# EAGLE board Secuencia_LEDs_MotherBoard_MIDI_&_BT (EAGLE 5.11)
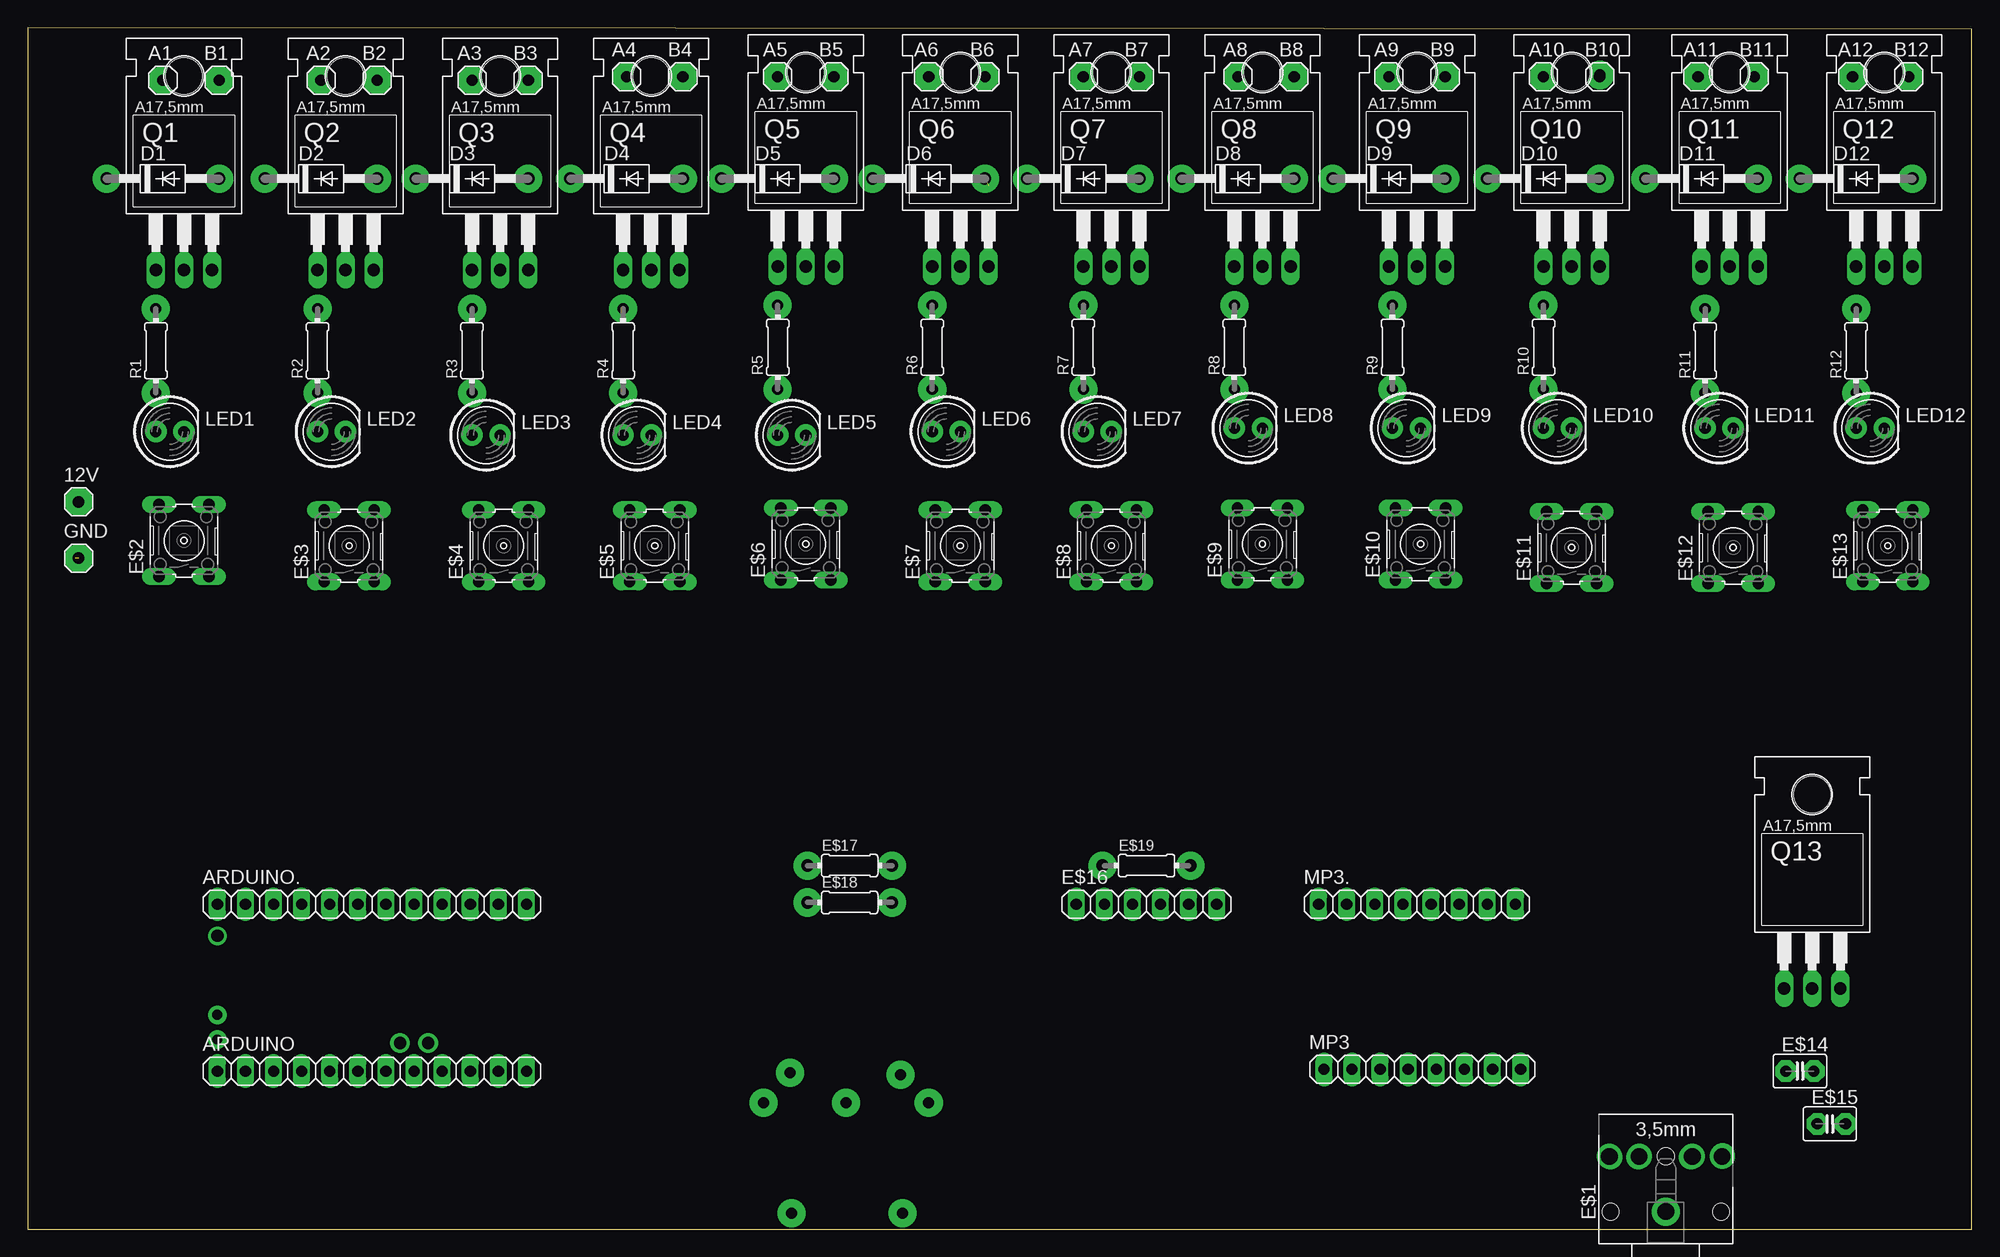
[diagram p0: board, top side]
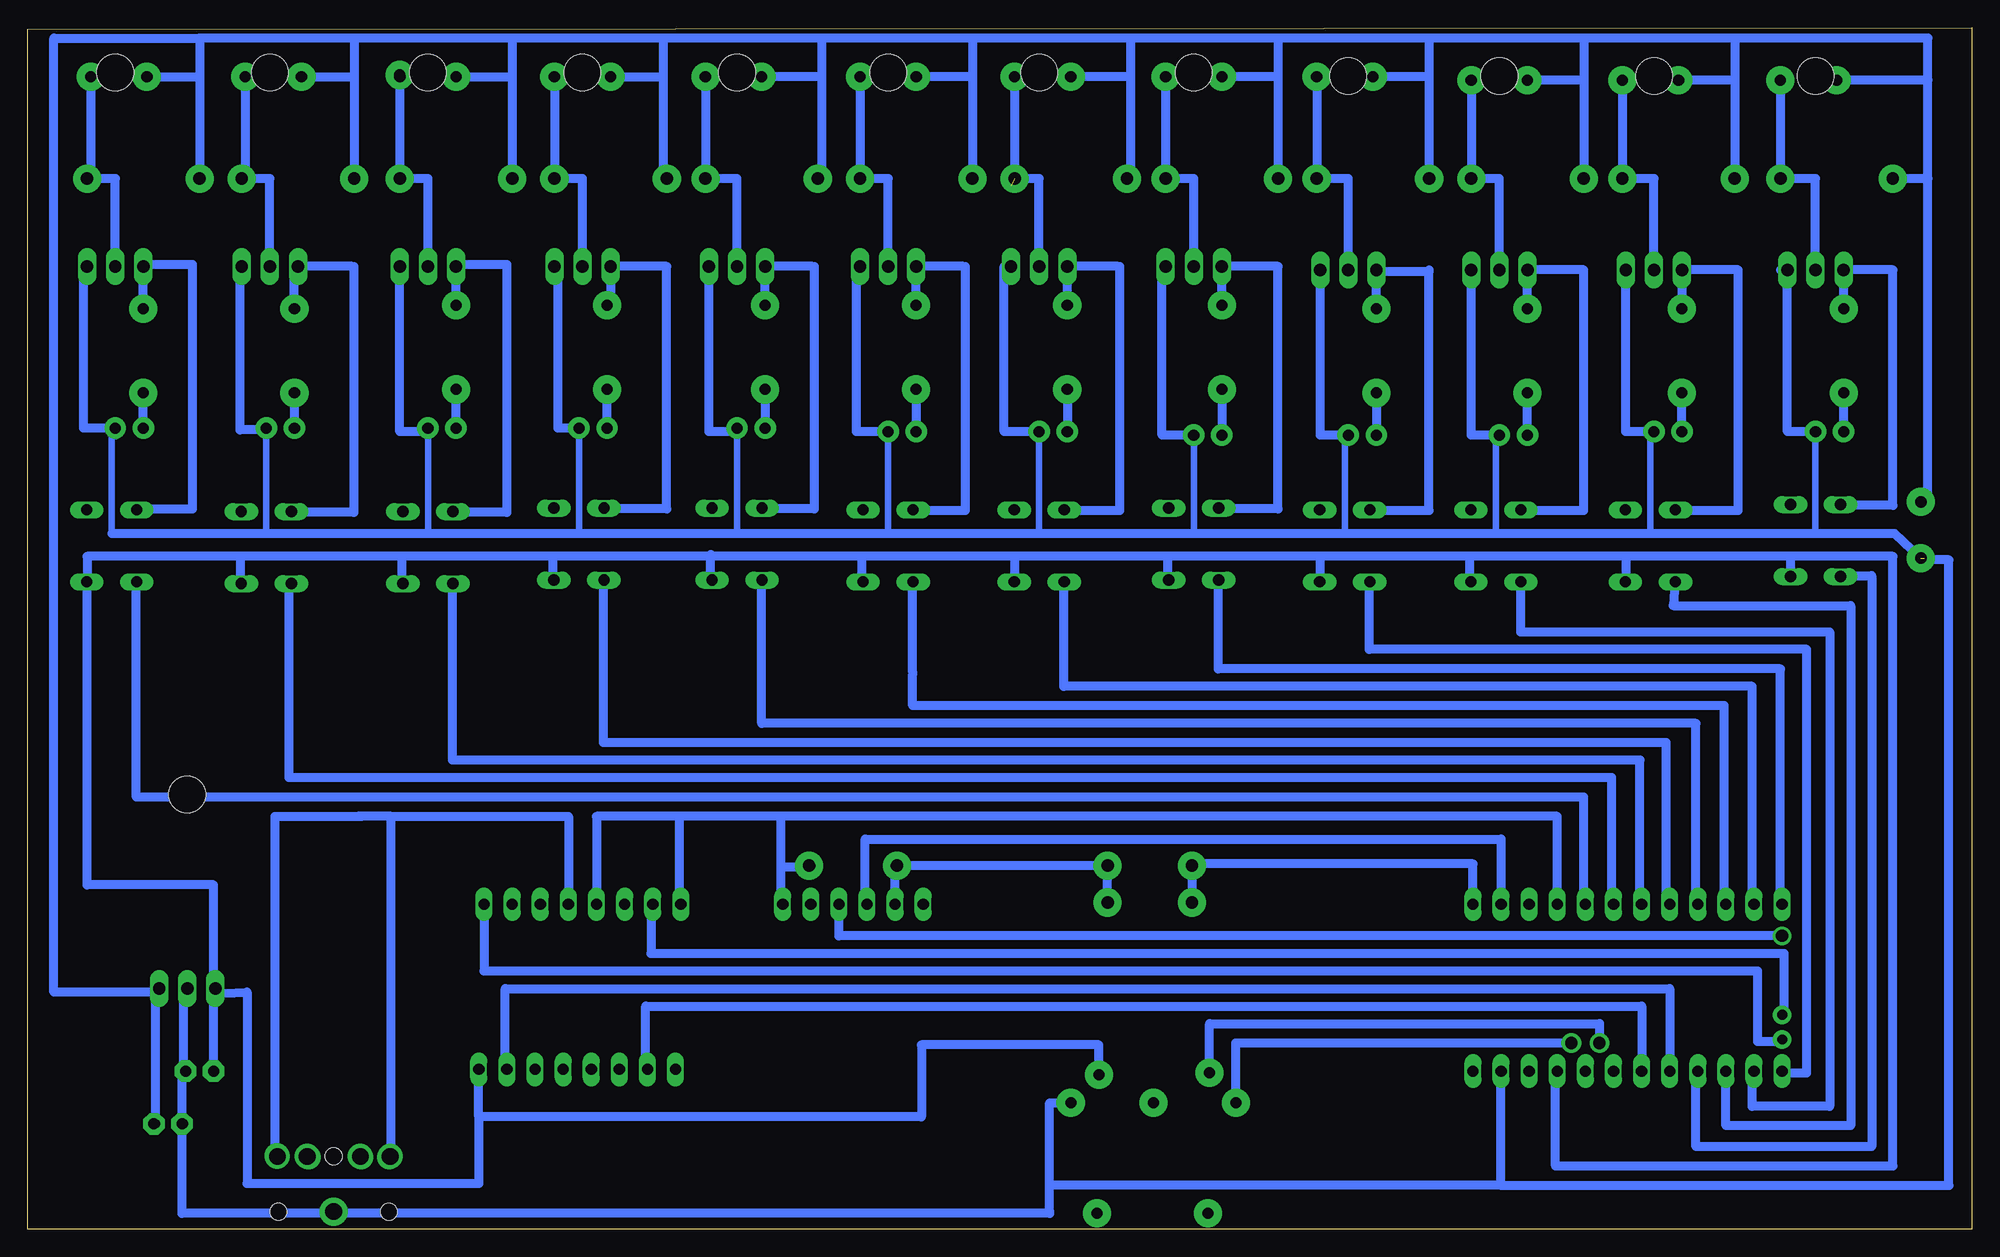
[diagram p1: board, bottom side, seen from below]

Size 175.72 x 108.57 mm. Coordinates in mm from the lower left corner, seen from the top.
Outline: 0,0 175.72,0 175.72,108.41 0,108.57 0,0
Copper layers (1*16): Top 0.035mm / dielectric 1.5mm / Bottom 0.035mm
Design rules "default": minimum track width 10mil, minimum drill 24mil, track to track 8mil, track to pad 8mil, pad to pad 8mil, via to via 8mil, smd to smd 8mil, copper to edge 40mil, drill to drill 8mil, minimum pad ring 10mil, minimum via ring 8mil, stop-mask expansion 4mil, vias tented up to drill 0mil, thermal gap 10mil

## Footprints (pad centres in the part's own frame; a part is rotated, then mirrored left to right if it is on the bottom)
1X01 = drill 1.016 octagon: 1 0,0
1X12 = drill 1.016 long: 1 -13.97,0; 2 -11.43,0; 3 -8.89,0; 4 -6.35,0; 5 -3.81,0; 6 -1.27,0; 7 1.27,0; 8 3.81,0; 9 6.35,0; 10 8.89,0; 11 11.43,0; 12 13.97,0
DO41-10 = drill 1.118 round: A 5.08,0; C -5.08,0
STX3100 = drill 1.5 pad 2.54 round: 1 2.7,-0.1 | drill 1.5 round: 2 7.7,5; 3 7.7,2.3; 4 7.7,-2.5; 5 7.7,-5.2 | hole 1.5: 2.7,4.9; 2.7,-5.1; 7.7,-0.1
B3F-10XX = drill 1.016 long: 1 -3.251,2.261; 2 3.251,2.261; 3 -3.251,-2.261; 4 3.251,-2.261
C2.5-3 = drill 0.813 pad 1.6 octagon: 1 -1.27,0; 2 1.27,0
1X06 = drill 1.016 long: 1 -6.35,0; 2 -3.81,0; 3 -1.27,0; 4 1.27,0; 5 3.81,0; 6 6.35,0
0204/7 = drill 0.813 octagon: 1 -3.81,0; 2 3.81,0
LED5MM = drill 0.813 octagon: A -1.27,0; K 1.27,0
1X08 = drill 1.016 long: 1 -8.89,0; 2 -6.35,0; 3 -3.81,0; 4 -1.27,0; 5 1.27,0; 6 3.81,0; 7 6.35,0; 8 8.89,0
TO220BH = drill 1.118 long: D 0,-6.35; G -2.54,-6.35; S 2.54,-6.35 | hole 3.302: 0,11.176

## Placement (x,y rotation side)
12V  [1X01]  4.6,65.72 0 top
A1  [1X01]  12.22,103.82 0 top
A2  [1X01]  26.51,103.82 0 top
A3  [1X01]  40.16,103.82 0 top
A4  [1X01]  54.13,104.14 0 top
A5  [1X01]  67.79,104.14 0 top
A6  [1X01]  81.44,104.14 0 top
A7  [1X01]  95.41,104.14 0 top
A8  [1X01]  109.38,104.14 0 top
A9  [1X01]  123.03,104.14 0 top
A10  [1X01]  137,104.14 0 top
A11  [1X01]  150.97,104.14 0 top
A12  [1X01]  164.94,104.14 0 top
ARDUINO  [1X12]  31.12,14.29 0 top
ARDUINO.  [1X12]  31.12,29.37 0 top
B1  [1X01]  17.3,103.82 0 top
B2  [1X01]  31.59,103.82 0 top
B3  [1X01]  45.24,103.82 0 top
B4  [1X01]  59.21,104.14 0 top
B5  [1X01]  72.87,104.14 0 top
B6  [1X01]  86.52,104.14 0 top
B7  [1X01]  100.49,104.14 0 top
B8  [1X01]  114.46,104.14 0 top
B9  [1X01]  128.11,104.14 0 top
B10  [1X01]  142.08,104.14 0 top
B11  [1X01]  156.05,104.14 0 top
B12  [1X01]  170.02,104.14 0 top
D1  1N4004  [DO41-10]  12.22,94.93 0 top
D2  1N4004  [DO41-10]  26.51,94.93 0 top
D3  1N4004  [DO41-10]  40.16,94.93 0 top
D4  1N4004  [DO41-10]  54.13,94.93 0 top
D5  1N4004  [DO41-10]  67.79,94.93 0 top
D6  1N4004  [DO41-10]  81.44,94.93 0 top
D7  1N4004  [DO41-10]  95.41,94.93 0 top
D8  1N4004  [DO41-10]  109.38,94.93 0 top
D9  1N4004  [DO41-10]  123.03,94.93 0 top
D10  1N4004  [DO41-10]  137,94.93 0 top
D11  1N4004  [DO41-10]  151.29,94.93 0 top
D12  1N4004  [DO41-10]  165.26,94.93 0 top
E$1  [STX3100]  147.96,-1.11 90 top
E$2  [B3F-10XX]  14.13,62.23 90 top
E$3  [B3F-10XX]  29.05,61.75 90 top
E$4  [B3F-10XX]  43.02,61.75 90 top
E$5  [B3F-10XX]  56.67,61.75 90 top
E$6  [B3F-10XX]  70.33,61.91 90 top
E$7  [B3F-10XX]  84.3,61.75 90 top
E$8  [B3F-10XX]  97.95,61.75 90 top
E$9  [B3F-10XX]  111.6,61.91 90 top
E$10  [B3F-10XX]  125.89,61.91 90 top
E$11  [B3F-10XX]  139.54,61.59 90 top
E$12  [B3F-10XX]  154.15,61.59 90 top
E$13  [B3F-10XX]  168.12,61.75 90 top
E$14  [C2.5-3]  160.18,14.29 0 top
E$15  [C2.5-3]  162.88,9.52 0 top
E$16  [1X06]  101.12,29.37 0 top
E$17  1 K  [0204/7]  74.3,32.86 0 top
E$18  1 K  [0204/7]  74.3,29.53 0 top
E$19  1 K  [0204/7]  101.12,32.86 0 top
GND  [1X01]  4.6,60.64 0 top
LED1  [LED5MM]  12.86,72.07 0 top
LED2  [LED5MM]  27.46,72.07 0 top
LED3  [LED5MM]  41.43,71.75 0 top
LED4  [LED5MM]  55.09,71.75 0 top
LED5  [LED5MM]  69.06,71.75 0 top
LED6  [LED5MM]  83.03,72.07 0 top
LED7  [LED5MM]  96.68,72.07 0 top
LED8  [LED5MM]  110.33,72.39 0 top
LED9  [LED5MM]  124.62,72.39 0 top
LED10  [LED5MM]  138.27,72.39 0 top
LED11  [LED5MM]  152.88,72.39 0 top
LED12  [LED5MM]  166.53,72.39 0 top
MP3  [1X08]  126.05,14.45 0 top
MP3.  [1X08]  125.57,29.37 0 top
Q1  IRLZ44Z  [TO220BH]  14.13,93.03 0 top
Q2  IRLZ44Z  [TO220BH]  28.73,93.03 0 top
Q3  IRLZ44Z  [TO220BH]  42.7,93.03 0 top
Q4  IRLZ44Z  [TO220BH]  56.36,93.03 0 top
Q5  IRLZ44Z  [TO220BH]  70.33,93.34 0 top
Q6  IRLZ44Z  [TO220BH]  84.3,93.34 0 top
Q7  IRLZ44Z  [TO220BH]  97.95,93.34 0 top
Q8  IRLZ44Z  [TO220BH]  111.6,93.34 0 top
Q9  IRLZ44Z  [TO220BH]  125.57,93.34 0 top
Q10  IRLZ44Z  [TO220BH]  139.54,93.34 0 top
Q11  IRLZ44Z  [TO220BH]  153.83,93.34 0 top
Q12  IRLZ44Z  [TO220BH]  167.8,93.34 0 top
Q13  IRLZ44Z  [TO220BH]  161.29,28.1 0 top
R1  2.2 k  [0204/7]  11.59,79.38 90 top
R2  2.2 k  [0204/7]  26.19,79.38 90 top
R3  2.2 k  [0204/7]  40.16,79.38 90 top
R4  2.2 k  [0204/7]  53.82,79.38 90 top
R5  2.2 k  [0204/7]  67.79,79.69 90 top
R6  2.2 k  [0204/7]  81.76,79.69 90 top
R7  2.2 k  [0204/7]  95.41,79.69 90 top
R8  2.2 k  [0204/7]  109.06,79.69 90 top
R9  2.2 k  [0204/7]  123.35,79.69 90 top
R10  2.2 k  [0204/7]  137,79.69 90 top
R11  2.2 k  [0204/7]  151.61,79.38 90 top
R12  2.2 k  [0204/7]  165.26,79.38 90 top

## Library data of the parts
12V A1-A12 ARDUINO ARDUINO. B1-B12 E$16 GND MP3 MP3. = pinhead
D1-D12 = diode
E$1 = adafruit
E$2-E$13 = switch-omron-vertical-long
E$14 E$15 = capacitor-wima
E$17-E$19 R1-R12 = resistor
LED1-LED12 = led
Q1-Q13 = transistor-power

## Nets
N$1: Q1.G R1.2
N$2: LED1.A R1.1
N$3: B1.1 D1.A Q1.D
N$7: Q2.G R2.2
N$8: LED2.A R2.1
N$9: D2.A Q2.D
N$11: A1.1 A2.1 A3.1 A4.1 A5.1 A6.1 A7.1 A8.1 A9.1 A10.1 A11.1 A12.1 D1.C D2.C D3.C D4.C D5.C D6.C D7.C D8.C D9.C D10.C D11.C D12.C
N$13: Q3.G R3.2
N$14: LED3.A R3.1
N$15: B3.1 D3.A Q3.D
N$19: Q4.G R4.2
N$20: LED4.A R4.1
N$21: B4.1 D4.A Q4.D
N$25: Q5.G R5.2
N$26: LED5.A R5.1
N$27: B5.1 D5.A Q5.D
N$32: LED6.A R6.1
N$33: D6.A Q6.D
N$38: LED7.A R7.1
N$39: B7.1 D7.A Q7.D
N$44: LED8.A R8.1
N$45: D8.A Q8.D
N$49: Q9.G R9.2
N$50: LED9.A R9.1
N$51: B9.1 D9.A Q9.D
N$55: Q10.G R10.2
N$56: LED10.A R10.1
N$57: B10.1 D10.A Q10.D
N$62: LED11.A R11.1
N$63: B11.1 D11.A Q11.D
N$68: LED12.A R12.1
N$69: B12.1 D12.A Q12.D
N$88: B8.1
N$142: B2.1
S$2: GND.1 LED1.K LED3.K LED4.K LED5.K LED6.K LED7.K LED8.K LED9.K LED10.K LED11.K LED12.K Q1.S Q3.S Q4.S Q5.S Q6.S Q7.S Q8.S Q9.S Q10.S Q11.S Q12.S
S$3: B6.1
S$32: Q12.G R12.2
S$48: Q11.G R11.2
S$51: Q6.G R6.2
S$52: Q7.G R7.2
S$53: Q8.G R8.2
S$55: LED2.K Q2.S
S$60: ARDUINO.6
S$97: E$16.2 E$19.1

## Tracks (layer width: path | path; a pad name or v marks a point on that pad's centre or on a via)
A7  (via drill 0.9 pad 1.68)
  other vias: 17.15,19.37
MIDI  (via drill 1 pad 2.54)
  other vias: 73.98,11.43
N$1
  Bottom 0.813: 11.91,65.41 7.14,65.41 7.14,86.68 Q1.G R1.2
N$2
  Bottom 0.813: LED1.A R1.1
N$3
  Bottom 0.813: Q1.D 14.13,94.93 D1.A B1.1
N$5  (via drill 1 pad 2.54)
  other vias: 7.14,94.93
N$6  (via drill 1 pad 2.54)
  other vias: 17.3,94.93
N$7
  Bottom 0.813: Q2.G 26.51,86.68 | Q2.G R2.2 | Q2.G 21.11,86.68 21.11,64.93 26.83,64.93
N$8
  Bottom 0.813: LED2.A R2.1
N$9
  Bottom 0.813: D2.A 28.73,94.93 Q2.D
N$11  (via drill 1 pad 2.54)
  Bottom 0.406: 18.57,107.63 17.94,107.63
  Bottom 0.813: 160.18,104.14 160.18,107.63 146.21,107.63 | 160.18,104.14 D12.C | 146.21,107.63 146.21,104.14 | 146.21,104.14 D11.C | D9.C 118.27,94.93 118.27,104.14 | 131.92,107.63 146.21,107.63 | 131.92,107.63 131.92,104.14 | 131.92,104.14 D10.C | D8.C 103.98,94.93 103.98,104.14 | 103.98,104.14 A8.1 | 118.27,107.63 131.92,107.63 | 118.27,107.63 118.27,104.14 | 90.33,104.14 D7.C | 90.33,104.14 A7.1 | 103.98,107.63 118.27,107.63 | 103.98,107.63 103.98,104.14 | D6.C 76.04,94.93 76.04,104.14 | 76.04,104.14 A6.1 | 90.33,107.63 103.98,107.63 | 90.33,107.63 90.33,104.14 | 62.71,104.14 A5.1 | 62.71,104.14 D5.C | 76.04,107.63 90.33,107.63 | 76.04,107.63 76.04,104.14 | 49.05,104.14 D4.C | 49.05,104.14 A4.1 | 62.71,107.63 76.04,107.63 | 62.71,107.63 62.71,104.14 | 35.08,103.82 D3.C | 35.08,103.82 A3.1 | 49.05,107.63 62.71,107.63 | 49.05,107.63 49.05,104.14 | 21.43,103.82 D2.C | 21.43,103.82 A2.1 | 35.08,107.63 49.05,107.63 | 35.08,107.63 35.08,103.82 | 21.43,107.63 35.08,107.63 | 21.43,107.63 21.43,103.82 | 21.43,107.63 18.57,107.63 3.97,107.63 3.97,103.82 | 3.97,103.82 A1.1 | 3.97,94.93 D1.C | 3.97,94.93 3.97,103.82 | v4.6,65.72 3.97,65.72 3.97,94.93 | A9.1 118.27,104.14 | A10.1 131.92,104.14 | A11.1 146.21,104.14 | A12.1 160.18,104.14
N$13
  Bottom 0.813: 40.8,64.93 35.08,64.93 35.08,86.68 Q3.G R3.2
N$14
  Bottom 0.813: LED3.A R3.1
N$15
  Bottom 0.813: Q3.D 42.7,94.93 D3.A B3.1
N$16  (via drill 1 pad 2.54)
  other vias: 4.6,60.64
N$17  (via drill 1 pad 1.93)
  other vias: 165.26,72.39
N$18  (via drill 1 pad 1.93)
  other vias: 167.8,72.39
N$19
  Bottom 0.813: 54.45,64.93 49.05,64.93 49.05,86.52 | 49.05,86.52 49.05,86.68 | Q4.G 54.13,86.68 54.13,86.04 53.82,86.04 | 53.82,86.04 Q4.G | R4.2 53.82,86.04 | 49.05,86.52 53.82,86.52 Q4.G
N$20
  Bottom 0.813: R4.1 LED4.A
N$21
  Bottom 0.813: Q4.D 56.36,94.93 D4.A B4.1
N$22  (via drill 1 pad 2.54)
  other vias: 165.26,75.56
N$23  (via drill 1 pad 2.54)
  other vias: 165.26,83.19
N$25
  Bottom 0.813: 68.1,65.09 62.71,65.09 62.71,87 Q5.G R5.2
N$26
  Bottom 0.813: R5.1 LED5.A
N$27
  Bottom 0.813: Q5.D 70.33,94.93 D5.A B5.1
N$30  (via drill 1 pad 2.54)
  other vias: 170.34,94.93
N$31
  Bottom 0.813: 82.07,64.93 76.99,64.93 76.99,87
N$32
  Bottom 0.813: R6.1 LED6.A
N$33  (1 unrouted)
  Bottom 0.813: D6.A 84.3,94.93 Q6.D
N$34  (via drill 1 pad 2.54)
  other vias: 160.18,94.93
N$37
  Bottom 0.813: 95.73,64.93 90.96,64.93 90.96,87
N$38
  Bottom 0.813: R7.1 LED7.A
N$39
  Bottom 0.813: Q7.D 97.95,94.93 D7.A B7.1
N$40  (via drill 1 pad 1.93)
  other vias: 154.15,72.39
N$41  (via drill 1 pad 1.93)
  other vias: 151.61,72.39
N$42  (via drill 1 pad 2.54)
  other vias: 151.61,75.56
N$43
  Bottom 0.813: 109.38,65.09 104.62,65.09 104.62,87
N$44
  Bottom 0.813: R8.1 LED8.A
N$45
  Bottom 0.813: Q8.D 111.6,94.93 D8.A 114.25,94.93
N$46  (via drill 1 pad 2.54)
  other vias: 151.61,83.19
N$49
  Bottom 0.813: R9.2 123.03,83.5 Q9.G 117.95,87 117.95,65.09 123.82,65.09
N$50
  Bottom 0.813: LED9.A R9.1
N$51
  Bottom 0.813: Q9.D 125.57,94.93 D9.A B9.1
N$53  (via drill 1 pad 2.54)
  other vias: 156.37,94.93
N$54  (via drill 1 pad 2.54)
  other vias: 146.21,94.93
N$55
  Bottom 0.813: R10.2 Q10.G
N$56
  Bottom 0.813: LED10.A R10.1
N$57
  Bottom 0.813: Q10.D 139.54,94.93 D10.A B10.1
N$58  (via drill 1 pad 1.93)
  other vias: 139.54,72.39
N$59  (via drill 1 pad 1.93)
  other vias: 137,72.39
N$60  (via drill 1 pad 2.54)
  other vias: 137,75.88
N$61
  Bottom 0.813: 152.08,64.77 146.21,64.77 146.21,87
N$62
  Bottom 0.813: R11.1 LED11.A
N$63
  Bottom 0.813: Q11.D 153.83,94.93 156.05,94.93 | 156.05,94.93 D11.A 156.48,94.93 | B11.1 156.05,94.93
N$64  (via drill 1 pad 2.54)
  other vias: 137,83.5
N$68
  Bottom 0.813: LED12.A R12.1
N$69
  Bottom 0.813: Q12.D 167.8,94.93 170.02,94.93 | 170.02,94.93 D12.A 170.13,95.89 | B12.1 170.02,94.93
N$71  (via drill 1 pad 2.54)
  other vias: 142.08,94.93
N$72  (via drill 1 pad 2.54)
  other vias: 131.92,94.93
N$73  (via drill 1 pad 1.93)
  other vias: 125.89,72.39
N$74  (via drill 1 pad 1.93)
  other vias: 123.35,72.39
N$75  (via drill 1 pad 2.54)
  other vias: 123.35,75.88
N$76  (via drill 1 pad 2.54)
  other vias: 123.35,83.5
N$80  (via drill 1 pad 2.54)
  other vias: 128.11,94.93
N$81  (via drill 1 pad 2.54)
  other vias: 117.95,94.93
N$82  (via drill 1 pad 1.93)
  other vias: 109.06,72.39
N$83  (via drill 1 pad 2.54)
  other vias: 109.06,75.88
N$84  (via drill 1 pad 2.54)
  other vias: 109.06,83.5
N$88  (via drill 1 pad 2.54)
  Bottom 0.813: B8.1 v114.46,94.93
N$89  (via drill 1 pad 2.54)
  other vias: 104.3,94.93
N$90  (via drill 1 pad 1.93)
  other vias: 97.95,72.07
N$91  (via drill 1 pad 1.93)
  other vias: 95.41,72.07
N$92  (via drill 1 pad 2.54)
  other vias: 95.41,75.88
N$93  (via drill 1 pad 2.54)
  other vias: 95.41,83.5
N$97  (via drill 1 pad 2.54)
  other vias: 100.49,94.93
N$98  (via drill 1 pad 2.54)
  other vias: 90.33,94.93
N$99  (via drill 1 pad 1.93)
  other vias: 84.3,72.07
N$100  (via drill 1 pad 1.93)
  other vias: 81.76,72.07
N$101  (via drill 1 pad 2.54)
  other vias: 81.76,75.88
N$102  (via drill 1 pad 2.54)
  other vias: 81.76,83.5
N$106  (via drill 1 pad 2.54)
  other vias: 86.52,94.93
N$107  (via drill 1 pad 2.54)
  other vias: 76.36,94.93
N$108  (via drill 1 pad 1.93)
  other vias: 70.33,71.75
N$109  (via drill 1 pad 1.93)
  other vias: 67.79,71.75
N$110  (via drill 1 pad 2.54)
  other vias: 67.79,75.88
N$111  (via drill 1 pad 2.54)
  other vias: 67.79,83.5
N$115  (via drill 1 pad 2.54)
  other vias: 72.87,94.93
N$116  (via drill 1 pad 2.54)
  other vias: 62.71,94.93
N$117  (via drill 1 pad 1.93)
  other vias: 56.36,71.75
N$118  (via drill 1 pad 1.93)
  other vias: 53.82,71.75
N$119  (via drill 1 pad 2.54)
  other vias: 53.82,75.56
N$120  (via drill 1 pad 2.54)
  other vias: 53.82,83.19
N$124  (via drill 1 pad 2.54)
  other vias: 59.21,94.93
N$125  (via drill 1 pad 2.54)
  other vias: 49.05,94.93
N$126  (via drill 1 pad 1.93)
  other vias: 42.7,71.75
N$127  (via drill 1 pad 1.93)
  other vias: 40.16,71.75
N$128  (via drill 1 pad 2.54)
  other vias: 40.16,75.56
N$129  (via drill 1 pad 2.54)
  other vias: 40.16,83.19
N$133  (via drill 1 pad 2.54)
  other vias: 45.24,94.93
N$134  (via drill 1 pad 2.54)
  other vias: 35.08,94.93
N$135  (via drill 1 pad 1.93)
  other vias: 28.73,72.07
N$136  (via drill 1 pad 1.93)
  other vias: 26.19,72.07
N$137  (via drill 1 pad 2.54)
  other vias: 26.19,75.56
N$138  (via drill 1 pad 2.54)
  other vias: 26.19,83.19
N$142  (via drill 1 pad 2.54)
  Bottom 0.813: B2.1 v31.59,94.93
N$143  (via drill 1 pad 2.54)
  other vias: 21.43,94.93
N$144  (via drill 1 pad 1.93)
  other vias: 14.13,72.07
N$145  (via drill 1 pad 1.93)
  other vias: 11.59,72.07
N$147  (via drill 1 pad 2.54)
  other vias: 11.59,75.56
N$148  (via drill 1 pad 2.54)
  other vias: 11.59,83.19
S$1
  Bottom 0.813: 126.84,29.37 126.84,37.31 142.87,37.31 | 142.87,37.31 145.89,37.31 | 142.87,6.51 142.87,37.31
S$2  (via drill 1 pad 1.93)  (1 unrouted)
  Bottom 0.61: 168.12,62.87 168.12,72.39 | LED11.K 154.15,72.23 154.15,62.87 | 139.54,62.87 LED10.K | 125.89,62.87 LED9.K | 111.6,62.87 111.6,72.07 | 97.95,62.87 LED7.K | 84.3,62.87 LED6.K | 70.33,62.87 LED5.K | 56.67,62.87 56.67,71.76 | 43.02,62.87 43.02,71.76 | 14.13,62.87 LED1.K | 29.05,62.87 29.05,72.23
  Bottom 0.813: Q12.S 170.66,87 170.66,72.39 LED12.K | 141.76,87 Q10.S 142.08,72.07 139.54,72.07 LED10.K 139.86,72.39 | LED12.K 167.8,71.76 | 156.53,87 Q11.S | 156.53,87 156.69,87 | 128.43,87 Q9.S 127.79,87 127.79,72.39 LED9.K | 156.53,87 156.53,72.23 154.15,72.23 | LED11.K 154.46,72.39 | 168.12,72.39 LED12.K | 168.12,62.87 154.15,62.87 139.54,62.87 125.89,62.87 111.6,62.87 97.95,62.87 84.3,62.87 70.33,62.87 56.67,62.87 43.02,62.87 29.05,62.87 14.13,62.87 6.98,62.87 GND.1 | 87.15,87 Q6.S 87.47,87 87.47,72.07 LED6.K | Q8.S 114.14,72.07 111.6,72.07 LED8.K | Q7.S 100.81,87 100.81,72.07 LED7.K | Q5.S 73.18,87 73.18,71.76 LED5.K | 45.56,86.68 Q3.S 45.24,71.76 LED3.K 43.02,71.76 | Q4.S 58.9,71.76 LED4.K 56.67,71.76 | 17.3,86.68 Q1.S 16.67,72.07 LED1.K | 4.29,60.64 4.29,60.01
  other vias: 111.6,72.39
S$3
  Bottom 0.813: B6.1 86.52,94.62
S$4  (via drill 0.9 pad 1.68)
  other vias: 17.15,17.14
S$5
  Bottom 0.813: 165.89,58.42 165.89,39.05 35.08,39.05 35.08,29.37
S$6
  Bottom 0.813: 17.14,14.13 14.92,14.13 14.92,52.39 54.45,52.39 54.45,58.42
S$7  (via drill 1 pad 2.54)
  other vias: 17.3,103.82
S$8  (via drill 1 pad 2.54)
  other vias: 12.22,103.82
S$9  (via drill 1 pad 2.54)
  other vias: 26.51,103.82
S$10  (via drill 1 pad 2.54)
  other vias: 31.59,103.82
S$11  (via drill 1 pad 2.54)
  other vias: 40.16,103.82
S$12  (via drill 1 pad 2.54)
  other vias: 45.24,103.82
S$13  (via drill 1 pad 2.54)
  other vias: 54.13,104.14
S$14  (via drill 1 pad 2.54)
  other vias: 59.21,104.14
S$15  (via drill 1 pad 2.54)
  other vias: 67.79,104.14
S$16  (via drill 1 pad 2.54)
  other vias: 72.87,104.14
S$17  (via drill 1 pad 2.54)
  other vias: 81.44,104.14
S$18  (via drill 1 pad 2.54)
  other vias: 86.52,104.14
S$19  (via drill 1 pad 2.54)
  other vias: 95.41,104.14
S$20  (via drill 1 pad 2.54)
  other vias: 100.49,104.14
S$21  (via drill 1 pad 2.54)
  other vias: 109.38,104.14
S$22  (via drill 1 pad 2.54)
  other vias: 114.46,104.14
S$23  (via drill 1 pad 2.54)
  other vias: 123.03,104.14
S$24  (via drill 1 pad 2.54)
  other vias: 128.11,104.14
S$25  (via drill 1 pad 2.54)
  other vias: 137,104.14
S$26  (via drill 1 pad 2.54)
  other vias: 142.08,104.3
S$27  (via drill 1 pad 2.54)
  other vias: 150.97,104.14
S$28  (via drill 1 pad 2.54)
  other vias: 156.05,104.14
S$29  (via drill 1 pad 2.54)
  other vias: 164.94,104.14
S$30  (via drill 1 pad 2.54)
  other vias: 170.02,104.14
S$31
  Bottom 0.813: 68.1,58.58 68.1,50.64 17.3,50.64 17.3,29.37
S$32
  Bottom 0.813: R12.2 Q12.G 165.26,87.15 160.81,87.15 160.81,65.09 165.89,65.09
S$33
  Bottom 0.813: 82.07,58.58 82.07,49.05 19.84,49.05 19.84,29.37
S$34
  Bottom 0.813: 95.73,50.32 95.73,58.42
S$35
  Bottom 0.813: 109.38,58.74 109.38,45.72 24.92,45.72 24.92,29.37
S$36
  Bottom 0.813: 123.67,52.07 123.67,58.58
S$37
  Bottom 0.813: 40.8,58.58 40.8,53.98 12.86,53.98 12.86,11.11 19.84,11.11 19.84,14.13
S$38
  Bottom 0.813: 32.38,29.37 32.54,29.37 32.54,40.8 152.08,40.8 152.08,58.42
S$39
  Bottom 0.813: 30,29.37 30,42.39 137.32,42.39 137.32,58.42
S$40
  Bottom 0.813: 27.46,29.37 27.62,29.37 27.62,43.97 123.67,43.97 123.67,51.91
S$41
  Bottom 0.813: 26.83,58.42 26.99,56.36 10.95,56.36 10.95,9.37 22.22,9.37 22.22,14.45
S$42
  Bottom 0.813: 22.38,29.37 22.38,47.31 95.73,47.31 95.73,50.17
S$43
  Bottom 0.813: 11.91,59.06 9.05,59.06 9.05,7.46 24.92,7.46 24.92,14.29
S$44
  Bottom 0.813: 31.27,60.8 7.14,60.8 7.14,5.72 37.62,5.72 37.62,14.29 | 31.27,60.8 45.4,60.8 | 45.4,60.8 58.9,60.8 | 58.9,60.8 58.9,60.64 | 58.9,60.8 72.71,60.8 | 72.71,60.8 86.52,60.8 | 86.52,60.8 100.33,60.8 | 100.33,60.8 128.27,60.8 | 128.27,60.8 141.92,60.8 | 141.92,60.8 156.53,60.8 | 31.27,60.8 31.27,58.58 | 45.4,60.8 45.4,58.58 | 72.71,60.8 72.71,58.74 | 86.68,58.58 86.52,58.58 86.52,60.8 | 100.33,60.8 100.33,58.58 | 128.27,60.8 128.27,58.74 | 141.76,58.26 141.92,58.26 141.92,60.8 | 156.53,60.8 156.53,58.42 | 156.53,60.8 170.34,60.8 170.34,58.74
S$45
  Bottom 0.813: 16.35,58.9 16.35,60.64
S$46
  Bottom 0.813: 58.9,58.42 58.9,60.8
S$47
  Bottom 0.813: 113.98,58.58 113.98,60.96
S$48
  Bottom 0.813: R11.2 151.61,87 Q11.G 146.37,87
S$49
  Bottom 0.813: 137.32,64.77 132.4,64.77 132.4,87.15 137,87.15
S$50
  Bottom 0.813: 91.12,87 95.57,87
S$51
  Bottom 0.813: Q6.G 82.07,87 | R6.2 Q6.G | 77.15,87 Q6.G
S$52
  Bottom 0.813: R7.2 Q7.G
S$53
  Bottom 0.813: R8.2 Q8.G
S$54
  Bottom 0.813: 104.77,87 109.22,87
S$55
  Bottom 0.813: Q2.S 31.27,72.07 LED2.K 29.04,72.07
S$56
  Bottom 0.813: 4.6,60.48 2.06,60.48 2.06,3.97 42.54,3.97 | 42.54,3.97 42.54,14.29 | 42.54,3.97 83.34,3.97 | 81.44,11.43 83.34,11.43 83.34,3.97 | 83.34,1.59 83.34,3.97
S$57
  Bottom 0.813: 119.38,29.21 119.38,24.92 16.99,24.92 16.99,19.37
S$58
  Bottom 0.813: 134.46,29.37 134.46,23.34 19.37,23.34 19.37,16.99 16.99,16.99 16.99,17.15
S$59
  Bottom 0.813: 132.56,14.45 132.56,21.75 27.3,21.75 27.3,14.61
S$60
  Bottom 0.813: 119.86,14.45 119.86,20.16 29.84,20.16 ARDUINO.6
S$61
  Bottom 0.813: 37.46,29.37 37.46,37.31 116.84,37.31 | 116.84,37.31 116.84,29.37 | 116.84,37.31 124.3,37.31 124.3,29.37
S$62  (via drill 1.1 pad 1.78)
  Bottom 0.813: v36.19,16.83 66.36,16.83
S$63  (via drill 1 pad 2.54)
  Bottom 0.813: v68.9,14.13 68.9,18.57
S$64  (via drill 1.1 pad 1.78)
  Bottom 0.813: 68.9,18.57 33.65,18.57 v33.65,16.83
S$65
  Bottom 0.813: 66.52,11.43 66.52,16.83
S$66  (via drill 1 pad 2.54)
  other vias: 66.52,11.43
S$67  (via drill 1 pad 2.54)
  Bottom 0.813: 134.94,10.16 134.94,14.61 | 134.94,10.16 94.93,10.16 94.93,16.67 78.9,16.67 v78.9,13.97 | 134.94,10.16 134.94,4.13 155.89,4.13 155.89,21.43 159.07,21.27
S$68  (via drill 1.1 pad 1.68)
  Bottom 0.813: v17.14,26.51 102.39,26.51 102.39,29.53
S$69
  Bottom 0.813: 107.63,29.37 107.63,32.7 | 107.63,32.7 107.63,37.31 | 105.25,32.7 107.63,32.7
S$70  (via drill 1 pad 2.18)
  other vias: 153.19,6.67
S$71  (via drill 1 pad 2.18)
  other vias: 148.11,1.59
S$72  (via drill 1 pad 2.18)
  other vias: 150.34,6.51
S$73  (via drill 1 pad 2.18)
  other vias: 145.57,6.51
S$74  (via drill 1 pad 2.18)
  other vias: 143.03,6.51
S$75
  Bottom 0.813: 161.45,21.91 161.61,21.91 161.61,14.29 161.77,14.29 161.77,1.43 83.34,1.43
S$76
  Bottom 0.813: 153.35,6.51 153.35,13.97 153.35,37.31 145.57,37.31
S$77  (via drill 1 pad 1.93)
  other vias: 158.91,14.29
S$78  (via drill 1 pad 1.93)
  other vias: 161.45,14.29
S$79  (via drill 1 pad 1.93)
  other vias: 161.77,9.52
S$80  (via drill 1 pad 1.93)
  Bottom 0.813: v164.31,9.53 164.15,9.53 164.15,21.75
S$81
  Bottom 0.813: 163.99,21.43 173.35,21.43 173.35,107.63 159.86,107.63
S$82
  Bottom 0.813: 158.91,13.97 158.91,31.12 170.34,31.12 170.34,58.42
S$84  (via drill 1 pad 2.54)
  other vias: 81.44,11.43
S$85
  Bottom 0.813: 37.46,15.24 37.46,14.45
S$86  (via drill 1 pad 2.54)
  other vias: 69.06,1.43
S$87  (via drill 1 pad 2.54)
  other vias: 79.06,1.43
S$88
  Bottom 0.813: 100.01,29.21 100.01,35.24 42.54,35.24 42.54,29.37
S$89  (via drill 1.1 pad 2.54)
  other vias: 70.49,32.86
S$90  (via drill 1.1 pad 2.54)
  other vias: 70.48,29.53
S$91  (via drill 1.1 pad 2.54)
  other vias: 78.11,32.86
S$92  (via drill 1.1 pad 2.54)
  other vias: 78.11,29.53
S$93  (via drill 1.1 pad 2.54)
  other vias: 97.16,32.86
S$94  (via drill 1.1 pad 2.54)
  other vias: 105.09,32.86
S$95
  Bottom 0.813: 45.08,29.21 45.08,33.02 70.48,33.02 70.48,29.53
S$96
  Bottom 0.813: 78.1,29.53 78.1,32.86
S$97
  Bottom 0.813: E$16.2 E$19.1 78.26,32.86